# EAGLE board Magnificent Snaget (1) (EAGLE 9.7.0)

Size 354.22 x 105.28 mm. Coordinates in mm from the lower left corner, seen from the top.
Outline: 0,0 354.21,0 354.21,105.28 0,105.28 0,0
Copper layers (1*16): Top 0.035mm / dielectric 1.5mm / Bottom 0.035mm
Design rules "default": minimum track width 6mil, minimum drill 0.35mm, track to track 6mil, track to pad 6mil, pad to pad 6mil, via to via 6mil, smd to smd 6mil, copper to edge 40mil, drill to drill 6mil, minimum pad ring 10mil, minimum via ring 8mil, stop-mask expansion 4mil, vias tented up to drill 0mil, thermal gap 10mil

## Footprints (pad centres in the part's own frame; a part is rotated, then mirrored left to right if it is on the bottom)
BATTERY-GENERIC = drill 1.118 pad 3.15 octagon: + 2.54,0; - -2.54,0
CAP-THRU-2.54MM = drill 1.016 pad 1.88: 1 -1.27,0; 2 1.27,0
LEDRD254W60D565H860B = drill 0.981 pad 1.581: 1 -1.27,0; 2 1.27,0
DIODE-AXIAL = drill 1: 1 -5.08,0; 2 5.08,0
MOTOR = drill 1.118 pad 3.15 octagon: + 2.54,0; - -2.54,0
PIEZO = drill 1 pad 1.6: 1 -3.5,0; 2 3.5,0
RESAD1016W63L850D250B = drill 0.83 pad 1.43: 1 -5.08,0; 2 5.08,0
HA-06-SM065 = drill 1 pad 1.676: 1 -2.54,-2.54; 2 0,2.54; 3 2.54,-2.54
TO92 = drill 0.813 octagon: 1 -1.27,0; 2 0,1.905; 3 1.27,0
TO220V = drill 1.016 long: 1 -2.54,-2.54; 2 0,-2.54; 3 2.54,-2.54
DIP826W53P254L959H508Q8B = drill 0.786 pad 1.386: 1 -4.13,3.81; 2 -4.13,1.27; 3 -4.13,-1.27; 4 -4.13,-3.81; 5 4.13,-3.81; 6 4.13,-1.27; 7 4.13,1.27; 8 4.13,3.81

## Placement (x,y rotation side)
BAT1  9V  [BATTERY-GENERIC]  8.26,97.03 90 top
C1  0.1u  [CAP-THRU-2.54MM]  93.03,30.83 0 top
C2  0.1u  [CAP-THRU-2.54MM]  138.75,33.37 0 top
C3  0.01u  [CAP-THRU-2.54MM]  251.64,34.27 0 top
CCT  10u  [CAP-THRU-2.54MM]  271.96,11.41 0 top
CCUP3  0.1u  [CAP-THRU-2.54MM]  226.24,34.27 0 top
D1  RED  [LEDRD254W60D565H860B]  181.93,15.59 180 top
D2  RED  [LEDRD254W60D565H860B]  348.16,11.41 180 top
D3  DIODEDIODE-AXIAL  [DIODE-AXIAL]  313.87,19.03 270 top
M1  MOTOR_HDR  [MOTOR]  284.48,73.46 0 top
PIEZO1  PIEZO  [PIEZO]  335.46,34.27 0 top
R1  330  [RESAD1016W63L850D250B]  175.58,10.51 0 top
R2  330  [RESAD1016W63L850D250B]  341.81,6.33 0 top
RPOT1  10k  [HA-06-SM065]  63.82,33.37 0 top
RPOT2  10k  [HA-06-SM065]  73.98,15.59 0 top
RPOT3  10k  [HA-06-SM065]  84.14,33.37 0 top
RPOT4  10k  [HA-06-SM065]  114.62,33.37 0 top
RRA  1k  [RESAD1016W63L850D250B]  255.45,16.49 180 top
RRB  47k  [RESAD1016W63L850D250B]  265.61,13.95 0 top
RRBASE  1k  [RESAD1016W63L850D250B]  306.25,21.57 90 top
RRPU1  4.7k  [RESAD1016W63L850D250B]  145.1,20.67 90 top
RRPU2  10k  [RESAD1016W63L850D250B]  157.8,18.13 90 top
T1  NPN  [TO92]  293.55,34.27 0 top
U1  LM7805_TO220V  [TO220V]  51.12,33.37 0 top
U2  LM393_DIP  [DIP826W53P254L959H508Q8B]  100.65,19.4 90 top
U3  LM393_DIP  [DIP826W53P254L959H508Q8B]  128.59,19.4 90 top
U5  LM555_DIP  [DIP826W53P254L959H508Q8B]  236.4,20.3 90 top

## Library data of the parts
BAT1 C1-C3 CCT CCUP3 D3 M1 PIEZO1 R1 R2 RPOT1-RPOT4 RRA RRB RRBASE RRPU1 RRPU2 U1-U3 = Tinkercad
D1 D2 = Tinkercad; CATEGORY: Opto-Electronic; SUB-CATEGORY: LED; VALUE: LED_RED
T1 = Tinkercad; CATEGORY: Transistor; SUB-CATEGORY: BJT; TYPE: NPN
U5 = Tinkercad; CATEGORY: IC_Clock-Timing; CURRENT-SUPPLY: 10mA; DESCRIPTION: IC OSC SINGLE TIMER 100KHZ 8-DIP; FREQUENCY: 100kHz; MANUFACTURER: Texas Instruments; MPN: LM555CN/NOPB; OPERATING_TEMP: 0°C to 70°C; PART_STATUS: Active; ROHS_COMPLIANT: ROHS3 Compliant; SUB-CATEGORY: Timer

## Nets
BAT1+: BAT1.+ U1.1
BAT1-: BAT1.- C1.1 C2.2 C3.2 CCT.2 CCUP3.1 PIEZO1.2 R2.1 RPOT1.3 RPOT2.3 RPOT3.3 RPOT4.3 T1.3 U1.2 U2.4 U3.4 U5.1
D1_C: D1.2 R1.2
D2_C: D2.2 R2.2
M1_+: C1.2 C2.1 CCUP3.2 D3.2 M1.+ RPOT1.1 RPOT2.1 RPOT3.1 RPOT4.1 RRA.2 RRPU1.2 RRPU2.2 U1.3 U2.8 U3.8 U5.8
M1_-: D3.1 M1.- T1.1
T1_B: RRBASE.2 T1.2
U2_+IN1: RPOT1.2 U2.3 U2.5 U3.2 U3.6
U2_-IN1: RPOT2.2 U2.2
U2_-IN2: RPOT3.2 U2.6
U2_OUT1: D1.1 RRPU1.1 U2.1 U3.1
U3_+IN1: RPOT4.2 U3.3 U3.5
U5_!RST: R1.1 RRBASE.1 RRPU2.1 U2.7 U3.7 U5.4
U5_CV: C3.1 U5.5
U5_DIS: RRA.1 RRB.1 U5.7
U5_OUT: D2.1 PIEZO1.1 U5.3
U5_TR: CCT.1 RRB.2 U5.2 U5.6

## Tracks (layer width: path | path; a pad name or v marks a point on that pad's centre or on a via)
BAT1+  (1 unrouted)
BAT1-  (16 unrouted)
D1_C  (1 unrouted)
D2_C  (1 unrouted)
M1_+  (15 unrouted)
M1_-  (2 unrouted)
T1_B  (1 unrouted)
U2_+IN1  (4 unrouted)
U2_-IN1  (1 unrouted)
U2_-IN2  (1 unrouted)
U2_OUT1  (3 unrouted)
U3_+IN1  (2 unrouted)
U5_!RST  (5 unrouted)
U5_CV  (1 unrouted)
U5_DIS  (2 unrouted)
U5_OUT  (2 unrouted)
U5_TR  (3 unrouted)